# Altium PCB KSS3.PcbDoc
Units mil, origin at the board's own origin, x right, y up, seen from the top; angles counter-clockwise.
Board outline 7047.24 x 2145.67 mil, 2 copper layers (Top Layer, Bottom Layer); 45 components, 47 nets, 181 pads, 6 vias.
Unrouted connection lines stored in the file: 36.
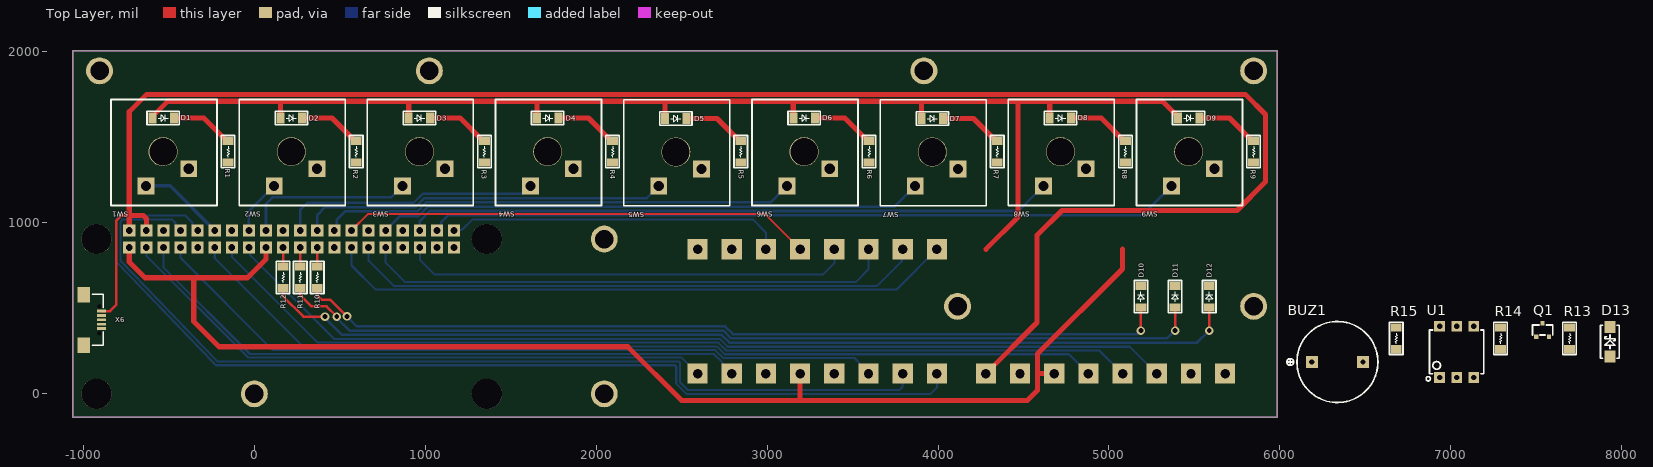
[diagram p0: Top Layer view]
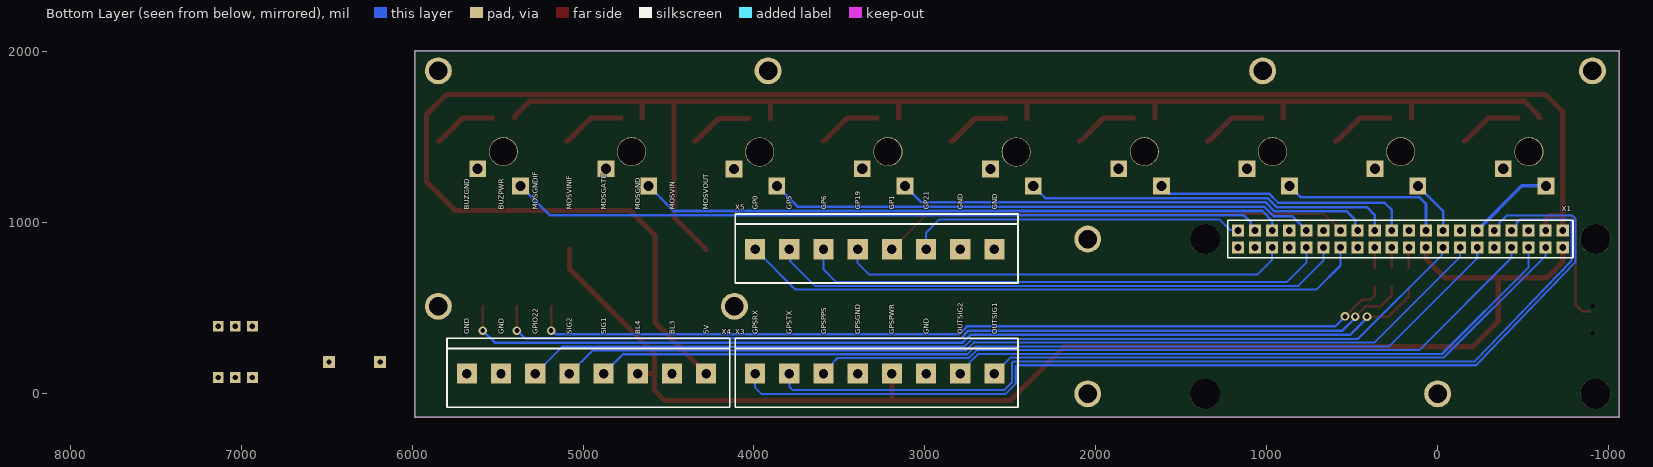
[diagram p1: Bottom Layer view, seen from below]

## Layer stack, top to bottom
Top Solder: solder mask 0.4, Solder Resist, Dk 3.5
Top Layer: signal copper 1.4
Dielectric 1: dielectric 12.6, FR-4, Dk 4.8
Bottom Layer: signal copper 1.4
Bottom Solder: solder mask 0.4, Solder Resist, Dk 3.5

## Board outline
-1062.99,-137.8 5984.25,-137.8 5984.25,2007.87 -1062.99,2007.87

## Design rules (kind name [scope] priority, off if disabled: settings)
Clearance [All] p1: gap=10 ignorepadtopadclearanceinfootprint=FALSE except(0: Arc-Hole Track-Hole SMDPad-Hole THPad-Hole Via-Hole Fill-Hole Poly-Hole Region-Hole Text-Hole; 6: SMDPad-SMDPad SMDPad-THPad)
ComponentClearance ComponentClearance_2 [All] p1: gap=0 collisioncheckmode=3 verticalgap=0 showdistances=FALSE
ComponentClearance ComponentClearance_1 [HasFootprint('Key switch Outemu') vs HasFootprint('LED_1206')] p2: gap=0 collisioncheckmode=3 verticalgap=0 showdistances=FALSE
ComponentClearance [All] p3: gap=10 collisioncheckmode=3 verticalgap=10 showdistances=FALSE
MinimumSolderMaskSliver [All] p1: minsoldermaskwidth=6
PlaneConnect [All] p1: planeconnectstyle=Relief reliefexpansion=20 reliefentries=4 reliefconductorwidth=20 reliefairgap=10
PolygonConnect [All] p1: connectstyle=Relief reliefconductorwidth=20 reliefentries=4 polygonreliefangle="90 Angle" airgapwidth=10
RoutingVias [All] p1: holewidth=28 width=50 viastyle="Through Hole" minholewidth=28 minwidth=50 maxholewidth=28 maxwidth=50
SolderMaskExpansion [All] p1: expansion=4 istentingtop=FALSE
Width [All] p1: maxlimit=30 minlimit=10 preferedwidth=10
27 further rules are at their usual default settings.

## Components (designator, comment, footprint, x,y, rotation, side; value= is the part's Value field where it differs from the comment)
BUZ1 "HCM1206X" HCM1206X 6336.2,186.21 r0 top
D1 "WH" LED_1206 -533.86,1613.39 r0 top
D2 "WH" LED_1206 216.14,1613.39 r0 top
D3 "WH" LED_1206 966.14,1613.39 r0 top
D4 "WH" LED_1206 1716.14,1613.39 r0 top
D5 "WH" LED_1206 2466.14,1610.24 r0 top
D6 "WH" LED_1206 3216.14,1613.39 r0 top
D7 "WH" LED_1206 3966.14,1610.24 r0 top
D8 "WH" LED_1206 4716.14,1613.39 r0 top
D9 "WH" LED_1206 5466.14,1613.39 r0 top
D10 "RED" LED_1206 5186.61,568.9 r90 top
D11 "YELLOW" LED_1206 5386.61,568.9 r90 top
D12 "GREEN" LED_1206 5586.61,568.9 r90 top
D13 "SS14" SMA/DO-214AC 7930.69,304.32 r90 top
Q1 "IRLML6402" SOT23_3_PIN 7536.99,373.22 r0 top
R1 "Resistor" "RES 1206" -153.94,1416.54 r90 top
R2 "Resistor" "RES 1206" 596.06,1416.54 r90 top
R3 "Resistor" "RES 1206" 1346.06,1416.54 r90 top
R4 "Resistor" "RES 1206" 2096.06,1416.54 r90 top
R5 "Resistor" "RES 1206" 2846.06,1416.54 r90 top
R6 "Resistor" "RES 1206" 3596.06,1416.54 r90 top
R7 "Resistor" "RES 1206" 4346.06,1416.54 r90 top
R8 "Resistor" "RES 1206" 5096.06,1416.54 r90 top
R9 "Resistor" "RES 1206" 5846.06,1416.54 r90 top
R10 "Resistor" "RES 1206" 368.36,681.1 r90 top
R11 "Resistor" "RES 1206" 268.36,681.1 r90 top
R12 "Resistor" "RES 1206" 168.36,681.1 r90 top
R13 "Resistor" "RES 1206" 7694.47,324.01 r90 top
R14 "Resistor" "RES 1206" 7290.93,324.01 r90 top
R15 "Resistor" "RES 1206" 6680.69,324.01 r90 top
SW1 "Pushbutton" "Key switch Outemu" -533.86,1416.54 r180 top
SW2 "Pushbutton" "Key switch Outemu" 216.14,1416.54 r180 top
SW3 "Pushbutton" "Key switch Outemu" 966.14,1416.54 r180 top
SW4 "Pushbutton" "Key switch Outemu" 1716.14,1416.54 r180 top
SW5 "Pushbutton" "Key switch Outemu" 2466.14,1414.96 r180 top
SW6 "Pushbutton" "Key switch Outemu" 3216.14,1416.54 r180 top
SW7 "Pushbutton" "Key switch Outemu" 3966.14,1414.96 r180 top
SW8 "Pushbutton" "Key switch Outemu" 4716.14,1416.54 r180 top
SW9 "Pushbutton" "Key switch Outemu" 5466.14,1416.54 r180 top
U1 "4N27" DIP6 7084.23,245.27 r0 top
X1 "GoldPin_F_20x2" GOLDPIN_F_20x2 -731.64,955.51 r0 bottom
X3 "?" "SCREW_TERMINAL_X8 5,08mm" 2592.91,118.11 r0 bottom
X4 "?" "SCREW_TERMINAL_X8 5,08mm" 4279.53,118.11 r0 bottom
X5 "?" "SCREW_TERMINAL_X8 5,08mm" 2592.91,845.67 r0 bottom
X6 "USB_MICRO_B" "USB_MICRO_B_940 KEYSTONE" -893.7,433.07 r270 top

## Footprints (in the part's own frame and the unit in brackets; to place one, negate y for a bottom-side part, rotate by r counter-clockwise, add the part's x,y. Pads: shape width x height; smd on the part's side, far side on the other; paste and mask are expansions set on the pad)
DIP6 [mm]
  rect 1.6x1.6 hole 0.8: 1(-3.81,-3.81) 2(-1.27,-3.81) 3(1.27,-3.81) 4(1.27,3.81) 5(-1.27,3.81) 6(-3.81,3.81)
  silkscreen extent -5.82,-4.32 2.75,3.25, body extent -5.31,-4 2.77,4, height 4.31
GOLDPIN_F_20x2 [mm]
  rect 1.8x1.8 hole 1: 1(0,0) 2(0,2.54) 3(2.54,0) 4(2.54,2.54) 5(5.08,0) 6(5.08,2.54) 7(7.62,0) 8(7.62,2.54) 9(10.16,0) 10(10.16,2.54) 11(12.7,0) 12(12.7,2.54) 13(15.24,0) 14(15.24,2.54) 15(17.78,0) 16(17.78,2.54) 17(20.32,0) 18(20.32,2.54) 19(22.86,0) 20(22.86,2.54) 21(25.4,0) 22(25.4,2.54) 23(27.94,0) 24(27.94,2.54) 25(30.48,0) 26(30.48,2.54) 27(33.02,0) 28(33.02,2.54) 29(35.56,0) 30(35.56,2.54) 31(38.1,0) 32(38.1,2.54) 33(40.64,0) 34(40.64,2.54) 35(43.18,0) 36(43.18,2.54) 37(45.72,0) 38(45.72,2.54) 39(48.26,0) 40(48.26,2.54)
  silkscreen extent -1.52,-1.52 49.78,4.06, body extent -1.29,-1.28 49.51,3.8, height 7.1
HCM1206X [mm]
  rect 1.8x1.8 hole 0.8: 1(-3.8,0) 2(3.8,0)
  silkscreen extent -7.5,-6.02 6.02,6.02, body extent -6,-6 5.99,6, height 9.5
"Key switch Outemu" [mm]
  rect 2.5x2.5 hole 1.5: 1(-3.81,2.54) 2(2.54,5.08)
  round 4.3 hole 4.1: MH(0,0)
  silkscreen extent -8,-7.75 7.75,8, body extent -9.13,-8.87 8.87,9.13, height 19.43
LED_1206 [mm]
  rect 1.2x1.6 smd: 1(-1.6,0) 2(1.6,0)
  silkscreen extent -2.4,-1 2.4,1, body extent -1.6,-0.8 1.6,0.8, height 0.62
"RES 1206" [mm]
  rect 1.2x1.6 smd: 1(-1.6,0) 2(1.6,0)
  silkscreen extent -2.4,-1 2.4,1, body extent -1.6,-0.8 1.6,0.8, height 0.58
"SCREW_TERMINAL_X8 5,08mm" [mm] "RASTER 5 mm"
  rect 3x3 hole 1.4: 1(0,0) 2(5.08,0) 3(10.16,0) 4(15.24,0) 5(20.32,0) 6(25.4,0) 7(30.48,0) 8(35.56,0)
  silkscreen extent -3.5,-5.25 38.5,5, body extent -3.1,-4.75 38.11,4.75, height 15.1
SMA/DO-214AC [mm]
  rect 1.8x1.6 smd: 1(-2.2,0) 2(2.2,0)
  silkscreen extent -2.45,-1.4 2.45,1.4, body extent -2.55,-1.35 2.55,1.35, height 1.96
SOT23_3_PIN [mm]
  rect 0.6x0.7 smd: 1(-0.95,-1) 2(0.95,-1) 3(0,1)
  silkscreen extent -1.5,-0.75 1.5,0.75, body extent -1.5,-1.25 1.5,1.25, height 1.1
"USB_MICRO_B_940 KEYSTONE" [mm]
  rect 0.4x1.35 smd: 1(-1.3,0) 2(-0.65,0) 3(0,0) 4(0.65,0) 5(1.3,0)
  round 0 hole 0.65 unplated: MH(-2,-0.35) MH(2,-0.35)
  rect 2.3x1.9 smd: MP(-3.75,-2.65) MP(3.75,-2.65)
  silkscreen extent -3.8,-1.4 3.8,0.25, body extent -4.08,-5.47 4.08,0.25, height 2.65

## Part data
BUZ1: "Buzzer", f="3000 Hz", V=3V
D1 D2 D3 D4 D5 D6 D7 D8 D9 D10 D11 D12: library part "Diode LED"
D13: "Schottky", I(AV)="1 A", IFSM="30 A", IR; TA=25="0.5 mA", IR; TA=100="20 mA", VF=0.7V, VRMS=28V, VRRM="40 V"
Q1: "P-MOSFET", IDmax=-3.7A, RDSon="0.065 Ohm", VDSS="-20 V", VGS="12 V"
R1 R2 R3 R4 R5 R6 R7 R8 R9: Resistance=100
R10 R11 R12: Resistance=56
R13: Resistance=33k
R14: Resistance=3.3k
R15: Resistance=470
U1: "Optocoupler"
X3 X4 X5: library part "Connector x8"

## Free pads (board coordinates)
  round 177.17 hole 177.17: MH(-923.37,0) MH(-923.37,905.51) MH(1360.09,0) MH(1360.09,905.51)
  round 157.48 hole 108.27: MH(-905.51,1889.76) MH(0,0) MH(1023.62,1889.76) MH(2047.24,0) MH(2047.24,905.51) MH(3917.32,1889.76) MH(3917.32,1889.76) MH(4114.17,511.81) MH(5846.46,1889.76) MH(5846.46,511.81)

## Via types
v1: diameter 50, hole 28, Top Layer to Bottom Layer, 6 vias

## Nets (pads, with @x,y where several pads share a name; then routed paths per layer and width w, separated by ;. In a path a pad name is that pad's centre, name@x,y a point inside that pad or via, vN(x,y) a via of type N, cw(c..) or ccw(c..) an arc to the next point about the centre after c; other vN are vias at no path point)
3V3: X1.2 X1.18 X3.4 X4.3 | length 7740.7
  Top Layer w30: X1.2@-731.64,860.21 -731.64,771.01 -639.76,679.13 -354.33,679.13 ; X1.18@68.36,860.21 68.36,786.87 -39.37,679.13 -354.33,679.13 ; X3.4 3192.91,-33.46 3198.82,-39.37 ; 4583.86,118.11 X4.3 ; 5079.53,845.67 5079.53,731.03 4582.45,233.94 4582.45,21.03 4522.05,-39.37 3198.82,-39.37 ; -354.33,679.13 -354.33,423.23 -206.69,275.59 2185.04,275.59 2500,-39.37 3198.82,-39.37
5V: D13.2 Q1.3 R13.1 X1.1 X1.3 X4.1 X6.1 | length 11086.5
  Top Layer w15: X6.1 -844.49,484.25 -807.09,521.65 -807.09,1013.78 -777.39,1043.47 -731.64,1043.47
  Top Layer w30: X1.1 -731.64,1043.47 ; X1.3 -631.64,1025.9 -649.21,1043.47 -731.64,1043.47 ; X4.1 4579.25,417.83 4579.25,846.46 ; 4578.46,845.67 4579.25,846.46 ; -731.64,1043.47 -731.64,1650.25 -629.92,1751.97 5797.24,1751.97 5915.35,1633.86 5915.35,1240.16 5748.03,1072.83 4724.41,1072.83 4579.25,927.67 4579.25,846.46
GND: BUZ1.2 D10.2 D11.2 D12.2 pad.MH@0,0 pad.MH@1023.62,1889.76 pad.MH@2047.24,0 pad.MH@2047.24,905.51 pad.MH@3917.32,1889.76 pad.MH@4114.17,511.81 pad.MH@5846.46,511.81 pad.MH@5846.46,1889.76 pad.MH@-905.51,1889.76 R1.1 R2.1 R3.1 R4.1 R5.1 R6.1 R7.1 R8.1 R9.1 SW1.1 SW2.1 SW3.1 SW4.1 SW5.1 SW6.1 SW7.1 SW8.1 SW9.1 U1.2 U1.4 X1.5 X1.10 X1.13 X1.19 X1.26 X1.29 X1.33 X1.40 X3.3 X3.5 X4.2 X4.7 X4.8 X5.1 X5.2 X6.5
GPIO0: X1.28 X5.8 | length 3685.9
  Bottom Layer w12: X1.28 568.36,750.54 709.55,609.35 3756.59,609.35 X5.8
GPIO1: X1.27 X5.4 | length 2750.9
  Top Layer w12: X1.27 666,1053.15 2985.43,1053.15 X5.4
GPIO2: X1.4 X3.1 | length 3562
  Bottom Layer w12: X1.4@-631.64,860.21 -631.64,808.8 -34.16,211.32 2499.7,211.32 X3.1
GPIO3: X1.6 X3.2 | length 3708
  Bottom Layer w12: X1.6@-531.64,860.21 -531.64,739.92 -25.04,233.32 2687.3,233.32 2739.86,180.77 2739.86,171.17 X3.2
GPIO4: X1.8 X3.6 | length 4375.3
  Bottom Layer w12: X1.8@-431.64,860.21 -431.64,795.81 108.85,255.32 2696.42,255.32 2742.15,209.59 3511.04,209.59 3539.86,180.77 3539.86,171.17 X3.6
GPIO5: X1.30 X5.7 | length 3389.1
  Bottom Layer w12: X1.30 668.36,778.49 815.5,631.35 3643.16,631.35 3787.45,775.64 3787.45,840.21 X5.7
GPIO6: X1.32 X5.6 | length 3108.3
  Bottom Layer w12: X1.32 768.36,767.07 882.09,653.35 3517.52,653.35 3592.91,728.74 X5.6
GPIO7: SW6.2 X1.25 | length 2784.6
  Bottom Layer w15: X1.25 481.16,968.31 481.16,1017.22 531.74,1067.8 953.36,1067.8 1005.18,1119.62 3019.23,1119.62 SW6.2
GPIO8: SW5.2 X1.23 | length 2159.1
  Bottom Layer w15: X1.23 368.36,1047.5 413.67,1092.8 943,1092.8 994.82,1144.62 2295.8,1144.62 SW5.2
GPIO9: R11.2 X1.22 | length 117.3
  Top Layer w15: R11.2@268.36,738.19 X1.22
GPIO10: R12.2 X1.20 | length 117.3
  Top Layer w15: R12.2@168.36,738.19 X1.20
GPIO11: R10.2 X1.24 | length 117.3
  Top Layer w15: R10.2@368.36,738.19 X1.24
GPIO12: SW7.2 X1.31 | length 3204.8
  Bottom Layer w15: X1.31 850.53,1037.68 958.59,1037.68 1015.53,1094.62 3745.8,1094.62 SW7.2@3865.81,1214.63
GPIO13: R15.1 X1.34
GPIO14: X1.7 X3.7 | length 5662.2
  Bottom Layer w12: X1.7@-431.64,960.21 -461.07,989.64 -461.07,999.24 -482.07,1020.24 -771.1,1020.24 -778.13,1013.21 -783.07,1002.27 -783.07,784.12 -783.07,779.28 -219,192.92 ccw(c-210.44,201.32) -218.92,192.84 -215.41,189.32 2483.44,189.32 2490.47,182.29 2490.47,68.34 2537.07,21.74 3771.98,21.74 3792.91,42.67 X3.7
GPIO15: X1.9 X3.8 | length 6057.2
  Bottom Layer w12: X1.9@-331.64,960.21 -361.07,989.64 -361.07,999.24 -404.91,1043.08 -787.63,1043.08 -807.09,1023.62 -807.09,792.04 -807.09,787.4 -805.07,770.17 -237.55,180.35 -224.52,167.32 2461.44,167.32 2468.47,160.29 2468.47,59.23 2527.96,-0.26 3956.68,-0.26 3992.91,35.98 X3.8
GPIO16: SW8.2 X1.35 | length 3789
  Bottom Layer w15: X1.35 968.36,1012.1 1025.89,1069.62 4469.23,1069.62 4574.43,1174.82 SW8.2
GPIO17: X1.12 X4.4 | length 5458.1
  Bottom Layer w12: X1.12@-231.64,860.21 -231.64,792.66 283.7,277.32 2705.53,277.32 2751.26,231.59 4766.05,231.59 X4.4
GPIO18: SW1.2 X1.11 | length 510.3
  Bottom Layer w20: SW1.2 -492.66,1216.54 X1.11
GPIO19: X1.36 X5.5 | length 2640.4
  Bottom Layer w12: X1.36 968.36,784.51 1055.52,697.35 1073.09,697.35 3325.3,697.35 3392.91,764.96 X5.5
GPIO20: SW9.2 X1.37 | length 4419.9
  Bottom Layer w15: X1.37 1092.78,979.93 1092.78,1003.78 1133.63,1044.62 5194.23,1044.62 SW9.2
GPIO21: X1.39 X5.3 | length 1982.1
  Bottom Layer w12: X1.39 1171.71,958.86 1214.76,958.86 1277.03,1021.12 2915.89,1021.12 2992.91,944.09 X5.3
GPIO22: X1.16 X4.6 | length 5642.7
  Bottom Layer w12: X1.16@-31.64,860.21 -26.4,854.97 -26.4,813.8 466.08,321.32 2723.75,321.32 2769.49,275.59 5122.05,275.59 X4.6
GPIO23: SW2.2 X1.15 | length 322.2
  Bottom Layer w15: X1.15 -31.64,1068.75 SW2.2
GPIO24: SW3.2 X1.17 | length 997.4
  Bottom Layer w15: X1.17 68.36,1111.67 106.52,1149.82 799.43,1149.82 SW3.2
GPIO25: SW4.2 X1.21 | length 1526.2
  Bottom Layer w15: X1.21 268.36,1075.45 310.72,1117.8 932.65,1117.8 984.46,1169.62 1565.64,1169.62 1570.84,1174.82 1574.43,1174.82 SW4.2
GPIO26: BUZ1.1 X1.38
GPIO27: X1.14 X4.5 | length 5553.3
  Bottom Layer w12: X1.14@-131.64,860.21 -131.64,800.93 369.97,299.32 2714.64,299.32 2760.37,253.59 4944.05,253.59 X4.5
KEYS_LED: D1.1 D2.1 D3.1 D4.1 D5.1 D6.1 D7.1 D8.1 D9.1 Q1.2 | length 7731.8
  Top Layer w30: D1.1 -588.23,1622.01 -588.23,1629.88 -506.14,1711.97 153.15,1711.97 ; D2.1 153.15,1711.97 ; D3.1 903.15,1711.97 ; D4.1 1653.15,1711.97 ; D5.1 2403.15,1711.97 ; D6.1 3153.15,1711.97 ; D7.1 3903.15,1711.97 ; 4279.53,845.67 4468.5,1034.65 4468.5,1711.97 ; D8.1 4653.15,1711.97 ; D9.1 5394.53,1622.01 5394.53,1629.88 5312.44,1711.97 4653.15,1711.97 ; 153.15,1711.97 903.15,1711.97 ; 903.15,1711.97 1653.15,1711.97 ; 1653.15,1711.97 2403.15,1711.97 ; 2403.15,1711.97 3153.15,1711.97 ; 3153.15,1711.97 3903.15,1711.97 ; 3903.15,1711.97 4468.5,1711.97 ; 4468.5,1711.97 4653.15,1711.97
NetD1_2: D1.2 R1.2 | length 372.4
  Top Layer w30: D1.2 -295.67,1613.39 -161.81,1479.53 R1.2
NetD2_2: D2.2 R2.2 | length 372.4
  Top Layer w30: D2.2 454.33,1613.39 588.19,1479.53 R2.2
NetD3_2: D3.2 R3.2 | length 372.4
  Top Layer w30: D3.2 1204.33,1613.39 1338.19,1479.53 R3.2
NetD4_2: D4.2 R4.2 | length 372.4
  Top Layer w30: D4.2 1954.33,1613.39 2088.19,1479.53 R4.2
NetD5_2: D5.2 R5.2 | length 371.1
  Top Layer w30: D5.2 2707.48,1610.24 2838.19,1479.53 R5.2
NetD6_2: D6.2 R6.2 | length 372.4
  Top Layer w30: D6.2 3454.33,1613.39 3588.19,1479.53 R6.2
NetD7_2: D7.2 R7.2 | length 371.1
  Top Layer w30: D7.2 4207.48,1610.24 4338.19,1479.53 R7.2
NetD8_2: D8.2 R8.2 | length 372.4
  Top Layer w30: D8.2 4954.33,1613.39 5088.19,1479.53 R8.2
NetD9_2: D9.2 R9.2 | length 372.4
  Top Layer w30: D9.2 5704.33,1613.39 5838.19,1479.53 R9.2
NetD10_1: D10.1 R10.1 | length 5111.5
  Top Layer w15: R10.1@368.36,624.02 368.36,576.52 393.7,551.18 443.81,551.18 v1(542.22,452.77) ; D10.1@5186.61,511.81 5187.01,511.42 v1(5187.01,370.08)
  Bottom Layer w15: v1(542.22,452.77) 542.22,451.87 599.27,394.82 2754.2,394.82 2799.93,349.09 5160.72,349.09 5181.71,370.08 v1(5187.01,370.08)
NetD11_1: D11.1 R11.1 | length 5434.2
  Top Layer w15: R11.1@268.36,624.02 268.36,578.1 334.65,511.81 422.18,511.81 v1(482.23,451.76) ; v1(5386.61,370.08) D11.1@5386.61,511.81
  Bottom Layer w15: v1(482.23,451.76) 482.23,444.89 557.3,369.82 2743.84,369.82 2789.58,324.09 5340.63,324.09 v1(5386.61,370.08)
NetD12_1: D12.1 R12.1 | length 5760.7
  Top Layer w15: R12.1@168.36,624.02 168.36,569.83 286.38,451.81 v1(413.39,451.81) ; v1(5586.61,370.08) D12.1@5586.61,511.81
  Bottom Layer w15: v1(413.39,451.81) 413.39,443.25 511.81,344.82 2733.49,344.82 2779.22,299.09 5515.63,299.09 v1(5586.61,370.08)
NetD13_1: D13.1 Q1.1 R13.2 R14.2
NetR14_1: R14.1 U1.5
NetR15_2: R15.2 U1.1
pads on no net: SW1.MH SW2.MH SW3.MH SW4.MH SW5.MH SW6.MH SW7.MH SW8.MH SW9.MH U1.3 U1.6 X6.2 X6.3 X6.4 X6.MH X6.MP

## Polygon pours and split planes (outlines as drawn)
GND on Bottom Layer "GND_L02_P003" (solid, remove dead copper, pour order 3): -807.09,4503.48 6240.16,4503.48 6240.16,2357.81 -807.09,2357.81
GND on Bottom Layer "GND" (none, remove dead copper, shelved, pour order 0): -1062.99,2007.87 -1062.99,-137.8 5984.25,-137.8 5984.25,2007.87
GND on Top Layer "GND_L01_P002" (solid, remove dead copper, pour order 2): -804.83,4504.47 6242.42,4504.47 6242.42,2358.8 -804.83,2358.8
GND on Top Layer "GND" (none, remove dead copper, shelved, pour order 1): -1062.99,2007.87 -1062.99,-137.8 5984.25,-137.8 5984.25,2007.87

## Keep-outs
Keep-Out Layer:
  the board outline again, w10

## Silkscreen, mask and mechanical layers (free items; w line width, h text height)
Bottom Overlay:
  text "GND" at 2577.92,1077.83 h30 r270
  text "GND" at 2777.92,1077.83 h30 r270
  text "GP21" at 2977.92,1077.83 h30 r270
  text "GP1" at 3177.92,1077.83 h30 r270
  text "GP19" at 3377.92,1077.83 h30 r270
  text "GP6" at 3577.92,1077.83 h30 r270
  text "GP5" at 3777.92,1077.83 h30 r270
  text "GP0" at 3977.92,1077.83 h30 r270
  text "MOSVOUT" at 4266.81,1077.83 h30 r270
  text "MOSVIN" at 4464.53,1077.83 h30 r270
  text "MOSGND" at 4664.53,1077.83 h30 r270
  text "MOSGATE" at 4864.53,1077.83 h30 r270
  text "MOSVINIF" at 5064.53,1077.83 h30 r270
  text "MOSGNDIF" at 5264.53,1077.83 h30 r270
  text "BUZPWR" at 5464.53,1077.83 h30 r270
  text "BUZGND" at 5664.53,1077.83 h30 r270
  text "OUTSIG1" at 2577.92,349.49 h30 r270
  text "OUTSIG2" at 2777.92,349.49 h30 r270
  text "GND" at 2977.92,349.49 h30 r270
  text "GPSPWR" at 3177.92,349.49 h30 r270
  text "GPSGND" at 3377.92,349.49 h30 r270
  text "GPSPPS" at 3577.92,349.49 h30 r270
  text "GPSTX" at 3777.92,349.49 h30 r270
  text "GPSRX" at 3977.92,349.49 h30 r270
  text "5V" at 4264.53,349.49 h30 r270
  text "BL3" at 4464.53,349.49 h30 r270
  text "BL4" at 4664.53,349.49 h30 r270
  text "SIG1" at 4864.53,349.49 h30 r270
  text "SIG2" at 5064.53,349.49 h30 r270
  text "GPIO22" at 5264.53,349.49 h30 r270
  text "GND" at 5464.53,349.49 h30 r270
  text "GND" at 5664.53,349.49 h30 r270